# EAGLE board plug-v22-delete-value (EAGLE 7.6.0)
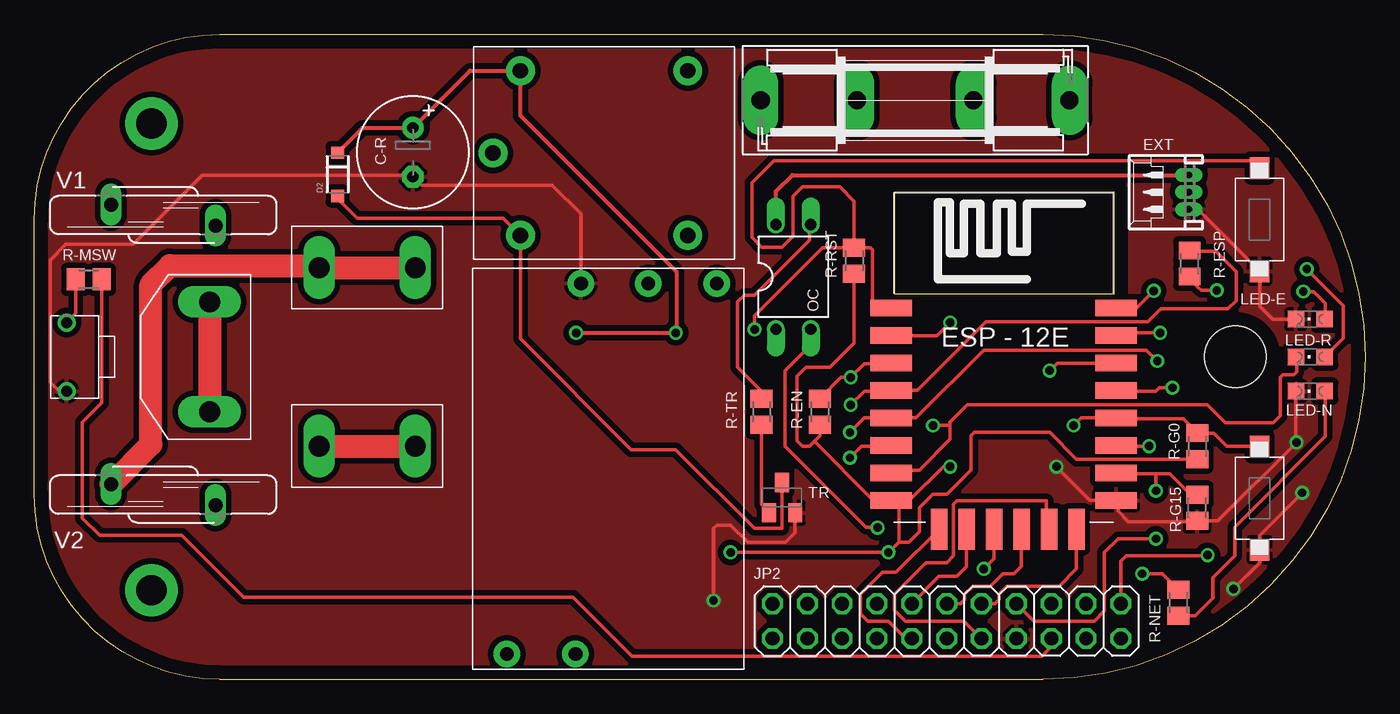
[diagram p0: board, top side]
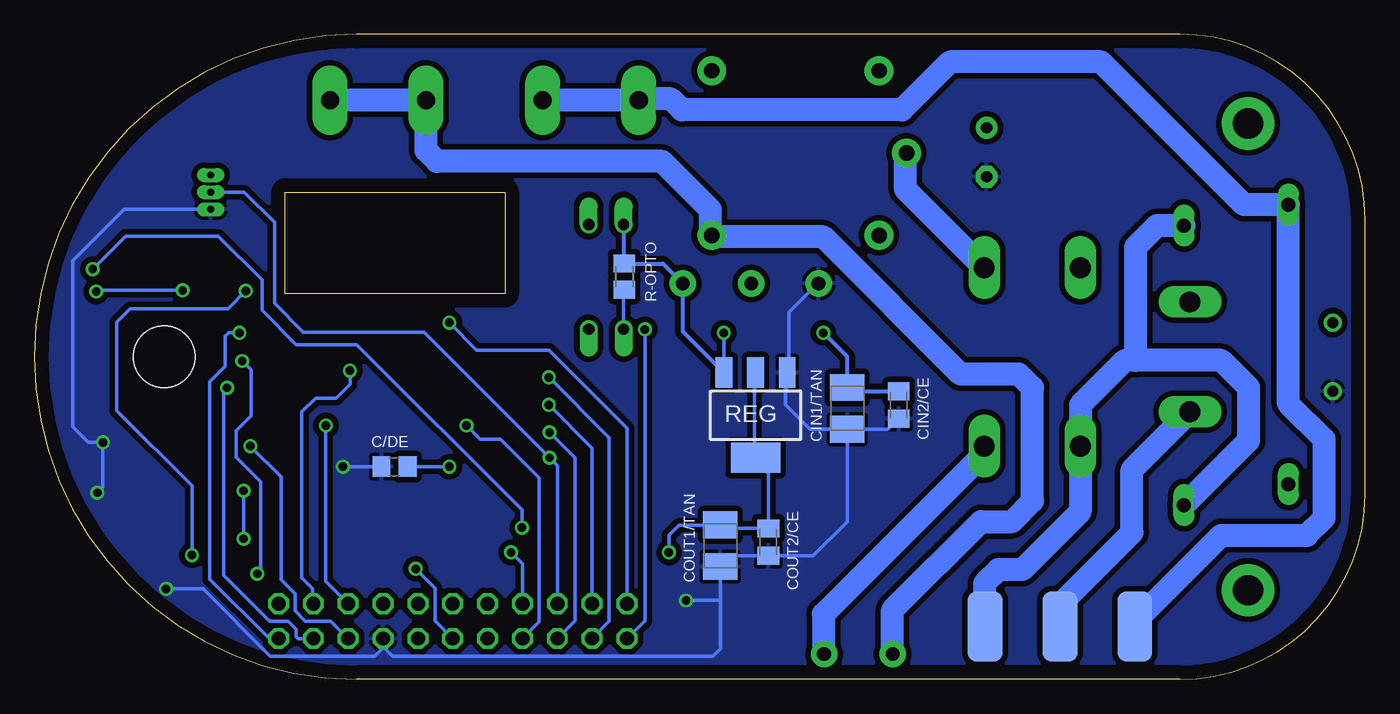
[diagram p1: board, bottom side, seen from below]

Size 97 x 47 mm. Coordinates in mm from the lower left corner, seen from the top.
Outline: 13.5,0 73.5,0 arc180 73.5,47 13.5,47 arc90 0,33.5 0,13.5 arc90 13.5,0
Outline: 62.7,28.1 78.7,28.1 78.7,35.5 62.7,35.5 62.7,28.1
Copper layers (1*16): Top 0.035mm / dielectric 1.5mm / Bottom 0.035mm
Design rules "default": minimum track width 10mil, minimum drill 24mil, track to track 8mil, track to pad 8mil, pad to pad 8mil, via to via 8mil, smd to smd 8mil, copper to edge 40mil, drill to drill 8mil, minimum pad ring 10mil, minimum via ring 8mil, stop-mask expansion 4mil, vias tented up to drill 0mil, thermal gap 10mil
Holes 4.5 mm at 87.54,23.5

## Footprints (pad centres in the part's own frame; a part is rotated, then mirrored left to right if it is on the bottom)
E3,5-8 = drill 0.813 pad 1.6: + -1.778,0 | drill 0.813 pad 1.6 octagon: - 1.778,0
C0805 = smd 1.3 x 1.5: 1 -0.95,0; 2 0.95,0
B/3528-21R = smd 1.95 x 2.5: + 1.525,0; - -1.525,0
C0805K = smd 1.3 x 1.6: 1 -1,0; 2 1,0
SOD-123 = smd 0.9 x 0.95: A 1.575,0; C -1.575,0
53048-03 = drill 0.5 pad 0.698 long: 1 1.25,-1.25; 2 0,-1.25; 3 -1.25,-1.25
2X11 = drill 1.016 octagon: 1 -12.7,-1.27; 2 -12.7,1.27; 3 -10.16,-1.27; 4 -10.16,1.27; 5 -7.62,-1.27; 6 -7.62,1.27; 7 -5.08,-1.27; 8 -5.08,1.27; 9 -2.54,-1.27; 10 -2.54,1.27; 11 0,-1.27; 12 0,1.27; 13 2.54,-1.27; 14 2.54,1.27; 15 5.08,-1.27; 16 5.08,1.27; 17 7.62,-1.27; 18 7.62,1.27; 19 10.16,-1.27; 20 10.16,1.27; 21 12.7,-1.27; 22 12.7,1.27
CHIPLED_0805 = smd 1.2 x 1.2: A 0,-1.05; C 0,1.05
DIL04 = drill 0.813 offset: 1 -1.27,-3.81; 2 1.27,-3.81; 3 1.27,3.81; 4 -1.27,3.81
M0805 = smd 1.3 x 1.6: 1 -0.95,0; 2 0.95,0
SOT-223 = smd 1.219 x 2.235: 1 -2.381,-3.099; 2 -0.07,-3.099; 3 2.241,-3.099 | smd 3.6 x 2.2: 4 -0.07,3.099
SW2-5.0-6.0X3.0X4.3MM = drill 0.8 pad 1.27: 1 -2.5,0; 2 2.5,0
SOT23-BEC = smd 1 x 1.4: B -0.95,-1.1; C 0,1.1; E 0.95,-1.1
ESP12E-SMD = smd 3 x 1.2: ADC -8.3,3.8; CH_PD -8.3,1.8; GND 8.1,-8.2; GPIO0 8.1,-2.2; GPIO2 8.1,-4.2; GPIO4 8.1,-0.2; GPIO5 8.1,1.8; GPIO12 -8.3,-4.2; GPIO13 -8.3,-6.2; GPIO14 -8.3,-2.2; GPIO15 8.1,-6.2; GPIO16 -8.3,-0.2; RESET -8.3,5.8; RXD0 8.1,3.8; TXD0 8.1,5.8; VCC -8.3,-8.2 | smd 1.2 x 3: CS0 -4.8,-10.3; GPIO9 -0.8,-10.3; GPIO10 1.2,-10.3; MISO -2.8,-10.3; MOSI 3.2,-10.3; SCLK 5.2,-10.3
TACT-SWITCH-SMD = smd 1.6 x 1.4: 1 -3.75,0; 2 3.75,0
RELAY-SONGLE = drill 1.118 pad 2.1: COM -8.1,0; NC 6.1,6; NO 6.1,-6; V+ -6.1,6; V- -6.1,-6
MALE-PLUG = smd 5.08 x 2.54: G 0,0; L 0,5.46; N 0,-5.46
POWERSUPPLY-5V-700MA = drill 1 pad 1.93: 5V 13.5,-7.9; AC1 -13.5,7.4; AC2 -13.5,2.4; GND 13.5,2; NONE 13.5,-2.9
FEMALE-PLUG = drill 1.524 long: G1 -6.73,4; G2 -6.73,-4; L1 1.27,6.5; L2 8.27,6.5; N1 1.27,-6.5; N2 8.27,-6.5
FUSE-CLIP = drill 1.321 pad 2.54 long: 1 -11.252,0; 2 11.252,0; 3 -11.252,0; 4 -4.252,0; 5 11.252,0; 6 4.252,0
S14K11 = drill 1.016 long: 1 -0.762,-3.81; 2 0.762,3.81

## Placement (x,y rotation side)
C-R  470-1000uF  [E3,5-8]  27.59,38.41 270 top
C/DE  0.1uF  [C0805]  70.75,15.5 180 bottom
CIN1/TAN  22uF  [B/3528-21R]  37.75,19.75 90 bottom
CIN2/CE  0.1uF  [C0805K]  34,20 270 bottom
COUT1/TAN  22uF  [B/3528-21R]  47,9.75 90 bottom
COUT2/CE  0.1uF  [C0805K]  43.5,10 270 bottom
D2  [SOD-123]  22.1,36.8 270 top
EXT  [53048-03]  82.9,35.5 90 top
JP2  [2X11]  66.5,4.25 0 top
LED-E  [CHIPLED_0805]  93,26.25 90 top
LED-N  [CHIPLED_0805]  93,21 90 top
LED-R  [CHIPLED_0805]  93,23.5 90 top
OC  PC817  [DIL04]  55.32,29.33 0 top
R-EN  10k  [M0805]  57.25,19.5 90 top
R-ESP  470  [M0805]  84.2,30.3 270 top
R-G0  10k  [M0805]  84.75,17 90 top
R-G15  1k  [M0805]  84.75,12.5 270 top
R-MSW  470  [M0805]  3.96,29.14 0 top
R-NET  470  [M0805]  83.39,5.58 270 top
R-OPTO  1k  [M0805]  54,29.35 90 bottom
R-RST  10k  [M0805]  59.75,30.5 90 top
R-TR  510  [M0805]  53,19.5 90 top
REG  [SOT-223]  44.5,19.25 180 bottom
SW1  [SW2-5.0-6.0X3.0X4.3MM]  2.35,23.5 270 top
TR  BC817  [SOT23-BEC]  54.5,13.25 0 top
U1  [ESP12E-SMD]  70.75,21.25 0 top
U$1  TACT-SWITCH-SMD  [TACT-SWITCH-SMD]  89.3,33.5 90 top
U$2  RELAY-SONGLE  [RELAY-SONGLE]  41.53,38.35 0 top
U$3  MALE-PLUG  [MALE-PLUG]  22.25,3.85 270 bottom
U$4  POWERSUPPLY-5V-700MA  [POWERSUPPLY-5V-700MA]  41.84,15.35 90 top
U$5  FEMALE-PLUG  [FEMALE-PLUG]  19.5,23.5 0 top
U$6  TACT-SWITCH-SMD  [TACT-SWITCH-SMD]  89.3,13.2 90 top
U$7  FUSE-CLIP  [FUSE-CLIP]  64.2,42.2 0 top
V1  [S14K11]  9.4,33.83 90 top
V2  [S14K11]  9.4,13.46 90 top

## Library data of the parts
C-R C/DE CIN1/TAN CIN2/CE COUT1/TAN COUT2/CE R-EN R-ESP R-G0 R-G15 R-MSW R-NET R-OPTO R-RST R-TR = rcl
D2 = SparkFun-DiscreteSemi
EXT = con-molex; MF: WALDOM/MOLEX; MPN: 53048-0310; OC_FARNELL: 9732918; OC_NEWARK: 38C9908
JP2 = pinhead
LED-E LED-N LED-R = led
OC = optocoupler; MPN: PC817X4J000F; OC_FARNELL: 9707727; OC_NEWARK: 97K7059
REG = AMS1117-3.3
SW1 = Seeed-OPL-Switch
TR = transistor-npn
U1 = esp8266modules
U$1 U$6 = Tact-Switch-SMD
U$2 = Relay-Songle
U$3 U$5 = Male-Female-PLUG
U$4 = PowerSupply-5V-700mA
U$7 = Fuse-Clip
V1 V2 = varistor

## Nets
3V3: C/DE.1 COUT1/TAN.+ COUT2/CE.1 JP2.8 R-EN.1 R-G0.1 R-RST.1 REG.2 REG.4 U1.VCC
+5V: C-R.+ CIN1/TAN.+ CIN2/CE.1 D2.C EXT.1 OC.4 R-OPTO.2 REG.3 U$2.V+ U$4.5V
ADC: JP2.2 U1.ADC
CS0: JP2.9 U1.CS0
EN: JP2.3 R-EN.2 U1.CH_PD
G: U$3.G U$5.G1 U$5.G2
G-00: JP2.18 R-G0.2 U1.GPIO0 U$6.2
G-02: JP2.17 R-MSW.2 U1.GPIO2
G-04: JP2.19 U1.GPIO4
G-05: JP2.20 U1.GPIO5
G-09: JP2.11 U1.GPIO9
G-10: JP2.12 U1.GPIO10
G-12: EXT.2 JP2.6 U1.GPIO12
G-13: JP2.7 LED-R.C U1.GPIO13
G-14: JP2.5 R-NET.1 U1.GPIO14
G-15: JP2.16 R-G15.1 U1.GPIO15
G-16: JP2.4 R-ESP.1 U1.GPIO16
GND: C-R.- C/DE.2 CIN1/TAN.- CIN2/CE.2 COUT1/TAN.- COUT2/CE.2 EXT.3 JP2.15 LED-E.C LED-N.C R-G15.2 REG.1 SW1.2 TR.E U1.GND U$1.1 U$4.GND U$6.1
LINE: U$3.L U$7.3 U$7.4 V1.2
MISO: JP2.10 U1.MISO
MOSI: JP2.13 U1.MOSI
N: U$3.N U$4.AC2 U$5.N1 U$5.N2 V1.1 V2.1
N$1: OC.3 R-TR.2
N$2: R-TR.1 TR.B
N$6: LED-E.A R-ESP.2
N$13: OC.1 R-OPTO.1
N$16: LED-N.A R-NET.2
N$17: D2.A TR.C U$2.V-
N$21: LED-R.A OC.2
N$22: R-MSW.1 SW1.1
RELAY-COM: U$2.COM U$5.L1 U$5.L2 V2.2
RELAY-NO: U$2.NO U$4.AC1 U$7.5 U$7.6
RST: JP2.1 R-RST.2 U1.RESET U$1.2
RX: JP2.21 U1.RXD0
SCLK: JP2.14 U1.SCLK
TX: JP2.22 U1.TXD0

## Tracks (layer width: path | path; a pad name or v marks a point on that pad's centre or on a via)
3V3  (via drill 0.61)
  Top 0.254: 63,13.05 U1.VCC 62.25,13.25 60.95,13.25 56.85,17.35 | 84.75,16 R-G0.1 75.95,16.05 74,18 68.5,18 68.25,17.75 68.25,15.25 66.5,13.5 65.5,13.5 64.5,12.5 64.5,10.75 63.75,10 63,10 | 63,10 v62.25,9.25 v50.75,9.25 | 63,10 63,13.05 | R-RST.1 59.75,24.5 58,22.75 56.25,22.75 55.6,22.1 55.6,17.4 56,17 56.5,17 56.85,17.35 | 56.85,17.35 57.25,17.75 R-EN.1 | 63,13.05 63.8,13.05 66.25,15.5 v66.75,15.5
  Bottom 0.254: v66.75,15.5 C/DE.1 | COUT1/TAN.+ 47,11 COUT2/CE.1 43.5,15 44.5,16 REG.4 44.5,16.25 44.5,22.25 REG.2 | 47,11.25 COUT1/TAN.+ | JP2.8 61.42,8.42 v62.25,9.25 | v50.75,9.25 50.75,10.5 50,11.25 47.02,11.25 COUT1/TAN.+
+5V  (via drill 0.61)
  Top 0.254: 46.8,25.3 v46.75,25.25
  Top 0.305: EXT.1 55.25,36.75 54.05,35.55 OC.4 | v39.5,25.25 v46.75,25.25 | 46.8,25.3 46.8,29.7 35.43,41.07 U$2.V+ 31.75,44.35 C-R.+ 23.91,40.19 D2.C
  Bottom 0.254: CIN1/TAN.+ 37.75,21 | REG.3 v46.74,25.24 v46.75,25.25 | 54.05,30.35 R-OPTO.2
  Bottom 0.305: 37.75,21 CIN2/CE.1 | CIN1/TAN.+ 37.75,23.5 v39.5,25.25 | OC.4 54.05,30.35 | R-OPTO.2 51.19,30.3 U$4.5V 49.74,25.35 REG.3
ADC  (via drill 0.61)
  Top 0.254: 62.25,25 U1.ADC 65.8,25.05 v66.75,26
  Bottom 0.254: v66.75,26 64.75,24 59.5,24 53.8,18.3 JP2.2
CS0
  Top 0.254: JP2.9 63.52,2.98 62.25,4.25 60.75,4.25 60.2,4.8 60.2,6.2 61.8,7.8 62.8,7.8 U1.CS0
EN  (via drill 0.61)
  Top 0.254: U1.CH_PD 62.25,23 60.5,23 v59.5,22 58.8,22 R-EN.2
  Bottom 0.254: JP2.3 55.1,4.22 55.1,17.6 v59.5,22
G
  Top 1.676: U$5.G1 U$5.G2
  Bottom 1.676: U$3.G 22.25,5.45 17,10.7 17,15.27 U$5.G2
G-00  (via drill 0.61)
  Top 0.254: U1.GPIO0 79,19 83.75,19 84.75,18 R-G0.2 85.95,17.95 86.9,17 89.25,17 U$6.2 | 78.75,19 U1.GPIO0 | v75.75,18.5 76.3,19.05 U1.GPIO0
  Bottom 0.254: JP2.18 75.75,7.15 v75.75,18.5
G-02  (via drill 0.61)
  Top 0.254: v81.25,17 79,17 U1.GPIO2 | JP2.17 74.12,2.37 73.45,1.7 43.55,1.7 39.25,6 15.25,6 10.75,10.5 4.75,10.5 3.5,11.75 3.5,18.75 4.91,20.16 R-MSW.2
  Bottom 0.254: JP2.17 75.39,4.25 77.25,4.25 78,5 78,6.25 79,7.25 79,14.75 v81.25,17
G-04  (via drill 0.61)
  Top 0.254: U1.GPIO4 79,21 81.75,21 82,21.25 v82.95,21.25
  Bottom 0.254: JP2.19 77.78,2.98 77.9,3.1 77.9,3.65 78.5,4.25 79.85,4.25 83.2,7.6 83.2,21 v82.95,21.25
G-05  (via drill 0.61)
  Top 0.254: 79,23 U1.GPIO5 74.55,23.05 v74,22.5
  Bottom 0.254: v74,22.5 74,21.5 75,20.5 76.5,20.5 77.5,19.5 77.5,7.4 76.7,6.6 76.7,5.56 JP2.20
G-09  (via drill 0.61)
  Top 0.254: v69.2,8.05 69.95,8.8 U1.GPIO9
  Bottom 0.254: JP2.11 67.8,4.28 67.8,6.65 v69.2,8.05
G-10
  Top 0.254: JP2.12 66.52,5.5 67.5,5.5 67.8,5.8 67.8,6.2 68.4,6.8 69.7,6.8 70.6,7.7 71.4,7.7 71.95,8.25 U1.GPIO10
G-12  (via drill 0.61)
  Top 0.254: U1.GPIO12 62.25,17 60.3,17 v59.45,16.15
  Bottom 0.254: JP2.6 58.88,15.58 v59.45,16.15 68.6,25.3 77.4,25.3 79.5,27.4 79.5,33.3 81.7,35.5 EXT.2
G-13  (via drill 0.61)
  Top 0.254: U1.GPIO13 62.5,15.25 64.5,15.25 66.75,17.5 66.75,18.5 | 66.75,18.5 66.75,18.75 68,20 85.5,20 86.8,18.7 90.3,18.7 90.8,19.2 90.8,22 91,22.2 91.8,22.2 92,22.4 92,23.45 LED-R.C | v65.5,18.5 66.75,18.5
  Bottom 0.254: v65.5,18.5 64.5,17.5 63,17.5 60.2,14.7 60.2,4.2 JP2.7
G-14  (via drill 0.61)
  Top 0.254: v59.45,18 60.5,19.05 U1.GPIO14 64.25,19.05 69.2,24 81.05,24 v81.85,23.2 | v80.75,7.7 82.22,7.7 R-NET.1
  Bottom 0.254: v81.85,23.2 81.2,22.55 81.2,19.2 82.3,18.1 82.3,16.2 80.5,14.4 80.5,7.95 v80.75,7.7 | JP2.5 57.6,4.26 57.6,16.15 v59.45,18
G-15  (via drill 0.61)
  Top 0.254: 81.75,15 79,15 U1.GPIO15 | R-G15.1 84.75,13.5 84.25,13.5 82.75,15 81.75,15 | JP2.16 72.85,4.25 77.25,4.25 78,5 78,9.25 79,10.25 v81.75,10.25 | v81.75,13.75 81.75,15
  Bottom 0.254: v81.75,13.75 v81.75,10.25
G-16  (via drill 0.61)
  Top 0.254: v59.5,20 60.5,21 62.25,21 U1.GPIO16 64.35,21.05 69.36,26.06 81.16,26.06 82.1,27 87,27 87.6,27.6 87.6,29.7 86.1,31.2 84.25,31.2 R-ESP.1
  Bottom 0.254: JP2.4 56.34,16.84 v59.5,20
GND  (via drill 0.61)
  Top 0.254: v74.5,15.5 76.95,13.05 U1.GND 79,13 79,12.25 79.75,11.5 84.58,11.5 | LED-E.C 90.25,26.25 89.3,27.2 U$1.1 84.8,34.25 EXT.3 | 55.5,12 TR.E 55.45,10.7 54.75,10 52,10 50.75,11.25 49.75,11.25 49.5,11 v49.5,5.75 | U$4.GND 39.84,33.91 37.75,36 28.22,36 C-R.- 27.5,36.75 12.25,36.75 7.2,31.7 2.3,31.7 1.15,30.55 1.15,21.65 1.8,21 SW1.2 | 84.58,11.5 84.7,11.5 | 84.58,11.5 84.58,11.43 R-G15.2 86.27,11.55 v92,17.27 91.95,17.32 LED-N.C | v87.4,6.6 89.3,8.5 U$6.1 89.3,10.5 v92.4,13.6
  Bottom 0.254: v74.5,15.5 C/DE.2 | CIN1/TAN.- 37.75,11.5 40.25,9 COUT2/CE.2 47,9 COUT1/TAN.- 47,5.75 | U$4.GND 40,28.75 42,26.75 42,22.5 REG.1 42.25,22.22 42.25,20 40.48,18.23 CIN1/TAN.- | v49.5,5.75 47,5.75 | CIN1/TAN.- 34.77,18.23 CIN2/CE.2 | 47,5.75 47,2.25 47.55,1.7 70.9,1.7 71.58,2.38 JP2.15 71.58,2.32 72.2,1.7 79.8,1.7 84.7,6.6 v87.4,6.6 | EXT.3 90.45,34.25 94.2,30.5 94.2,18.4 93.07,17.27 v92,17.27 92,14 v92.4,13.6
  pour Bottom (isolate 0.406): 0,0 97.5,0 97.5,48.1 0,48.1
  pour Top (isolate 0.406): 0,0 97.1,0 97.1,47.7 0,47.7
LINE
  Bottom 1.676: U$3.L 16.79,4.21 10.5,10.5 4.25,10.5 3,11.75 3,17.5 5.59,20.09 V1.2 8.84,34.59 19.25,45 30.25,45 33.75,41.5 49.8,41.5 50.6,42.3 52.95,42.3 U$7.3 U$7.4
MISO
  Top 0.254: JP2.10 65.94,7.5 67.25,7.5 67.95,8.2 U1.MISO
MOSI
  Top 0.254: U1.MOSI 73.75,11 73.75,13 67.25,13 67,12.75 67,9 66.5,8.5 65,8.5 62.7,6.2 62.7,5.05 63.5,4.25 67.77,4.25 JP2.13
N
  Top 1.676: U$5.N1 U$5.N2
  Bottom 1.676: U$5.N2 27.77,16.48 39.5,4.75 39.5,1.91 U$4.AC2 | U$3.N 27.75,3.89 27.75,7 26.75,8 25,8 20.77,12.23 U$5.N1 20.75,17.02 20.75,20 17.5,23.25 16.75,23.25 | 16.75,23.25 10.5,23.25 8.5,21.25 8.5,17.41 V2.1 | V1.1 15.18,33.07 16.75,31.5 16.75,23.25
N$1
  Top 0.254: R-TR.2 53,21 51.25,22.75 51.25,27.5 51.75,28 52.5,28 56.5,32 56.5,33.05 OC.3
N$2
  Top 0.254: TR.B 53.5,12.25 53,12.75 R-TR.1
N$3  (via drill 2.2 pad 3.81)
  other vias: 8.54,6.5
N$4  (via drill 2.2 pad 3.81)
  other vias: 8.54,40.5
N$6  (via drill 0.61)
  Top 0.254: v86.18,28.35 85.04,28.35 84.81,28.57 R-ESP.2 | LED-E.A 94.1,26.3 94.1,27.4 93.24,28.26 v92.48,28.26
  Bottom 0.254: v86.18,28.35 92.4,28.35 v92.48,28.26
N$13
  Bottom 0.254: OC.1 54.05,28.35 R-OPTO.1
N$16
  Top 0.254: 93.95,20.8 LED-N.A 94.1,20.95 94.1,17.7 87.5,11.1 87.5,9 85.9,7.4 85.9,5.9 84.63,4.63 R-NET.2
N$17
  Top 0.254: TR.C 54.5,11 52.5,11 46.75,16.75 43.5,16.75 35.43,24.82 U$2.V- 34.18,33.6 23.52,33.6 22.1,35.02 D2.A
N$21  (via drill 0.61)
  Top 0.254: OC.2 56.59,24.39 54.7,22.5 54.7,17 60.6,11.1 61.42,11.1 v61.47,11.06 | LED-R.A 95.4,24.85 95.4,27.23 v92.74,29.89
  Bottom 0.254: v61.47,11.06 61.47,12.37 73.5,24.4 77.9,24.4 80.4,26.9 80.4,29.1 83.6,32.3 90.33,32.3 v92.74,29.89
N$22
  Top 0.254: R-MSW.1 3.01,26.66 SW1.1
RELAY-COM
  Top 1.676: U$5.L2 U$5.L1 20.62,30.15 9.9,30.15 8.5,28.75 8.5,17.13 V2.2
  Bottom 1.676: U$5.L2 27.8,30 33.5,35.7 33.5,38.28 U$2.COM
RELAY-NO
  Bottom 1.676: U$4.AC1 34.44,5.06 28,11.5 25.75,11.5 24.25,13 24.25,21.25 25.25,22.25 29.5,22.25 39.5,32.25 47.53,32.25 U$2.NO 47.75,32.47 47.75,34.25 51.25,37.75 67.65,37.75 68.45,38.55 U$7.6 U$7.5
RST  (via drill 0.61)
  Top 0.254: v52.5,25.5 52.5,26.5 57.45,31.45 R-RST.2 | U$1.2 88.75,37.8 53.9,37.8 52.3,36.2 52.3,32.2 53,31.5 54.5,31.5 55.3,32.3 55.3,35.2 56,35.9 58.7,35.9 59.75,34.85 R-RST.2 | R-RST.2 60.95,31.45 61.1,31.3 61.1,27.2 61.3,27 62.4,27 U1.RESET
  Bottom 0.254: v52.5,25.5 52.5,4.28 JP2.1
RX  (via drill 0.61)
  Top 0.254: U1.RXD0 79,25.25 v82.05,25.25
  Bottom 0.254: JP2.21 79.22,3 79.9,3 84.2,7.3 84.2,21.7 83.1,22.8 83.1,25 82.85,25.25 v82.05,25.25
SCLK
  Top 0.254: U1.SCLK 75.95,8.05 74.7,6.8 70.9,6.8 70.3,6.2 70.3,5.8 70,5.5 69.06,5.5 JP2.14
TX  (via drill 0.61)
  Top 0.254: JP2.22 79.2,8.6 79.6,9 85.45,9 v85.51,9.06 | v81.58,28.3 80.33,27.05 U1.TXD0
  Bottom 0.254: v85.51,9.06 85.51,14.11 90.98,19.58 90.98,26.02 90,27 82.89,27 v81.58,28.3